# Altium PCB versi 1.0.PcbDoc (part 2 of 2)
Units mm, origin at the board's own origin, x right, y up, seen from the top; angles counter-clockwise.
Board outline 227.58 x 135.13 mm, 2 copper layers (Top Layer, Bottom Layer); 54 components, 49 nets, 360 pads, 39 vias.
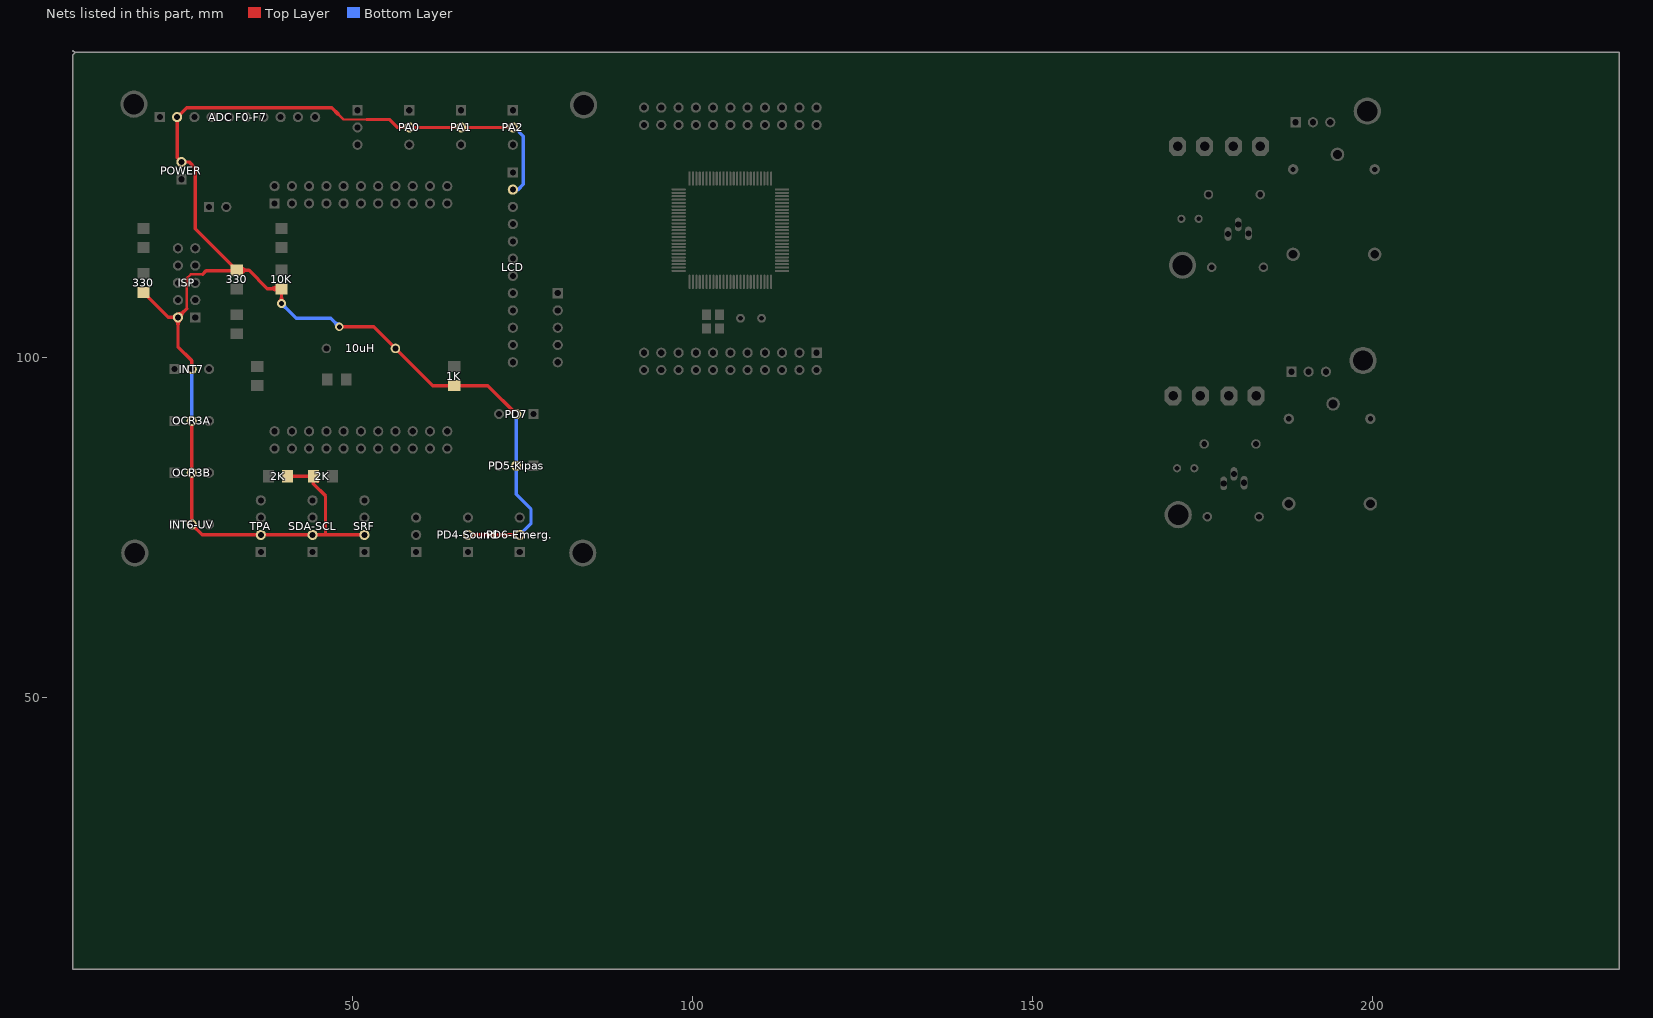
[diagram p2: the nets of this part, all layers, seen from the top]

## Via types
v1: diameter 1.27, hole 0.711, Top Layer to Bottom Layer, 39 vias

## Nets (pads, with @x,y where several pads share a name; then routed paths per layer and width w, separated by ;. In a path a pad name is that pad's centre, name@x,y a point inside that pad or via, vN(x,y) a via of type N, cw(c..) or ccw(c..) an arc to the next point about the centre after c; other vN are vias at no path point) (continued)
VCC: 1K.2 2K.2 10K.2 10uH.2 330.1@32.893,112.906 330.2@19.177,109.598 "ADC F0-F7.2" INT6-UV.2 INT7.2 ISP.2 LCD.2 OCR3A.2 OCR3B.2 PA0.2 PA1.2 PA2.2 PD4-Sound.2 PD5-Kipas.2 PD6-Emerg..2 PD7.2 POWER.2 SDA-SCL.2 SRF.2 TPA.2 | length 274.2
  Top Layer w0.35: 25.527,107.188 25.527,111.633 26.162,112.268 27.877,112.268 ; 47.879,135.763 48.605,135.037 52.034,135.037
  Top Layer w0.5: 330.2@19.177,109.598 22.857,105.918 ISP.2@24.257,105.918 ; ISP.2@23.903,105.564 cw(c23.05,104.711) 24.257,104.711 cw(c25.464,104.711) ISP.2@24.611,105.564 ; ISP.2@24.257,106.418 ccw(c24.257,107.625) 25.111,106.772 ccw(c25.964,105.918) ISP.2@24.757,105.918 ; 25.527,107.188 ISP.2@24.257,105.918 ; OCR3A.2@25.935,90.832 cw(c25.082,89.979) 26.289,89.979 cw(c27.496,89.979) OCR3A.2@26.643,90.832 ; INT6-UV.2@26.289,75.438 27.813,73.914 TPA.2@36.449,73.914 SDA-SCL.2@44.069,73.914 SRF.2@51.689,73.914 ; INT6-UV.2@26.289,76.073 OCR3A.2@26.289,90.678 ; INT7.2@26.289,98.298 26.289,99.568 24.257,101.6 ISP.2@24.257,105.918 ; 27.877,112.268 28.384,112.776 330.1@32.893,112.776 ; 330.1@32.808,112.941 cw(c32.722,112.856) 330.1@32.843,112.856 ; 330.1@32.893,112.856 34.718,112.856 37.418,110.156 39.497,110.156 v1(39.497,107.95) ; 330.1@32.893,112.906 32.843,112.906 26.797,118.952 26.797,127.889 25.908,128.778 POWER.2@24.765,128.778 24.13,129.413 24.13,135.382 25.527,136.779 46.863,136.779 47.879,135.763 ; 33.855,112.644 cw(c34.367,112.132) 34.367,112.856 cw(c34.367,113.58) 33.855,113.068 ; 38.535,109.944 ccw(c38.023,109.432) 38.023,110.156 ccw(c38.023,110.88) 38.535,110.368 ; v1@39.225,108.222 ccw(c38.568,108.879) 39.497,108.879 ccw(c40.426,108.879) v1@39.769,108.222 ; 10K.2@39.285,109.944 cw(c38.773,109.432) 39.497,109.432 cw(c40.221,109.432) 10K.2@39.709,109.944 ; 2K.2@40.339,82.55 2K.2@44.069,82.55 ; 2K.2@40.551,82.338 cw(c41.063,81.826) 41.063,82.55 cw(c41.063,83.274) 2K.2@40.551,82.762 ; 2K.2@44.031,82.338 ccw(c43.519,81.826) 43.519,82.55 ccw(c43.519,83.274) 2K.2@44.031,82.762 ; 2K.2@44.126,82.49 cw(c44.127,82.486) 2K.2@44.13,82.489 ; 2K.2@44.193,82.55 44.193,81.41 45.974,79.629 45.974,73.914 ; 2K.2@44.21,81.997 cw(c44.325,81.314) 2K.2@44.815,81.804 ; v1(48.006,104.521) 53.086,104.521 10uH.2@56.261,101.346 61.725,95.882 1K.2@64.897,95.882 69.853,95.882 PD7.2@74.041,91.694 ; 52.034,135.037 55.372,135.037 56.551,133.858 PA0.2@58.293,133.858 PA1.2@65.913,133.858 PA2.2@73.533,133.858 ; PD4-Sound.2@66.929,73.914 PD6-Emerg..2@74.549,73.914
  Bottom Layer w0.5: OCR3A.2@26.289,90.678 INT7.2@26.289,98.298 ; v1@39.497,107.565 cw(c39.497,106.636) 40.154,107.293 cw(c40.811,107.95) v1@39.882,107.95 ; v1(39.497,107.95) 41.656,105.791 46.736,105.791 v1(48.006,104.521) ; v1@47.621,104.521 ccw(c46.692,104.521) 47.349,105.178 ccw(c48.006,105.835) v1@48.006,104.906 ; LCD.2@73.533,124.714 74.295,124.714 75.057,125.476 75.057,132.588 73.787,133.858 PA2.2@73.533,133.858 ; PD7.2@74.041,91.694 PD5-Kipas.2@74.041,84.074 74.041,79.883 76.2,77.724 76.2,75.565 PD6-Emerg..2@74.549,73.914
pads on no net: 2.1 2.2 22pF.1 22pF.2 220.1 220.2 220_1.1 220_1.2 _2.1 _2.2 ATmega2560.1 ATmega2560.2 ATmega2560.3 ATmega2560.4 ATmega2560.5 ATmega2560.6 ATmega2560.7 ATmega2560.8 ATmega2560.9 ATmega2560.10 ATmega2560.11 ATmega2560.12 ATmega2560.13 ATmega2560.14 ATmega2560.15 ATmega2560.16 ATmega2560.17 ATmega2560.18 ATmega2560.19 ATmega2560.20 ATmega2560.21 ATmega2560.22 ATmega2560.23 ATmega2560.24 ATmega2560.25 ATmega2560.26 ATmega2560.27 ATmega2560.28 ATmega2560.29 ATmega2560.30 ATmega2560.31 ATmega2560.32 ATmega2560.33 ATmega2560.34 ATmega2560.35 ATmega2560.36 ATmega2560.37 ATmega2560.38 ATmega2560.39 ATmega2560.40 ATmega2560.41 ATmega2560.42 ATmega2560.43 ATmega2560.44 ATmega2560.45 ATmega2560.46 ATmega2560.47 ATmega2560.48 ATmega2560.49 ATmega2560.50 ATmega2560.51 ATmega2560.52 ATmega2560.53 ATmega2560.54 ATmega2560.55 ATmega2560.56 ATmega2560.57 ATmega2560.58 ATmega2560.59 ATmega2560.60 ATmega2560.61 ATmega2560.62 ATmega2560.63 ATmega2560.64 ATmega2560.65 ATmega2560.66 ATmega2560.67 ATmega2560.68 ATmega2560.69 ATmega2560.70 ATmega2560.71 ATmega2560.72 ATmega2560.73 ATmega2560.74 ATmega2560.75 ATmega2560.76 ATmega2560.77 ATmega2560.78 ATmega2560.79 ATmega2560.80 ATmega2560.81 ATmega2560.82 ATmega2560.83 ATmega2560.84 ATmega2560.85 ATmega2560.86 ATmega2560.87 ATmega2560.88 ATmega2560.89 ATmega2560.90 ATmega2560.91 ATmega2560.92 ATmega2560.93 ATmega2560.94 ATmega2560.95 ATmega2560.96 ATmega2560.97 ATmega2560.98 ATmega2560.99 ATmega2560.100 Batt.1 Batt.2 Header.A.1@118.237,100.711 Header.A.2@115.697,100.711 Header.A.3@113.157,100.711 Header.A.4@110.617,100.711 Header.A.5@108.077,100.711 Header.A.6@105.537,100.711 Header.A.7@102.997,100.711 Header.A.8@100.457,100.711 Header.A.9@97.917,100.711 Header.A.10@95.377,100.711 Header.A.11@92.837,100.711 Header.A.12@118.237,98.171 Header.A.13@115.697,98.171 Header.A.14@113.157,98.171 Header.A.15@110.617,98.171 Header.A.16@108.077,98.171 Header.A.17@105.537,98.171 Header.A.18@102.997,98.171 Header.A.19@100.457,98.171 Header.A.20@97.917,98.171 Header.A.21@95.377,98.171 Header.A.22@92.837,98.171 Header.B.1@92.837,134.239 Header.B.2@95.377,134.239 Header.B.3@97.917,134.239 Header.B.4@100.457,134.239 Header.B.5@102.997,134.239 Header.B.6@105.537,134.239 Header.B.7@108.077,134.239 Header.B.8@110.617,134.239 Header.B.9@113.157,134.239 Header.B.10@115.697,134.239 Header.B.11@118.237,134.239 Header.B.12@92.837,136.779 Header.B.13@95.377,136.779 Header.B.14@97.917,136.779 Header.B.15@100.457,136.779 Header.B.16@102.997,136.779 Header.B.17@105.537,136.779 Header.B.18@108.077,136.779 Header.B.19@110.617,136.779 Header.B.20@113.157,136.779 Header.B.21@115.697,136.779 Header.B.22@118.237,136.779 Kipas.1 Kipas.2 LED.1 LED.2 Mikon.1 Mikon.2 Mikon.3 xtal.1 xtal.2
copper on no net: | length 1695.3
  Top Layer w0.3: 92.262,98.171 ccw(c90.874,98.171) 91.855,99.153 ccw(c92.837,100.134) 92.837,98.746 ; 92.344,136.483 ccw(c91.821,136.169) 91.821,136.779 ; 92.344,137.075 cw(c91.821,137.389) 91.821,136.779 ; 92.43,101.118 ccw(c91.449,102.099) 92.837,102.099 ccw(c94.225,102.099) 93.244,101.118 ; 92.837,98.171 91.44,99.568 91.44,108.585 93.345,110.49 93.345,120.269 95.821,122.745 97.937,122.745 ; 92.837,100.711 92.837,108.585 96.997,112.745 97.937,112.745 ; 92.837,133.664 cw(c92.837,132.276) 93.819,133.257 cw(c94.8,134.239) 93.412,134.239 ; 92.837,134.239 95.377,131.699 99.822,131.699 100.076,131.445 102.362,131.445 103.378,130.429 104.013,130.429 104.648,129.794 104.648,129.159 103.537,128.048 103.537,126.345 ; 92.837,136.779 91.821,136.779 ; v1@94.432,125.024 cw(c95.218,124.238) 95.218,125.349 cw(c95.218,126.46) v1@94.432,125.674 ; v1@94.488,125.349 95.631,125.349 96.735,124.245 97.937,124.245 ; v1(94.615,114.935) 94.805,114.745 97.937,114.745 ; v1@94.693,115.013 ccw(c95.339,115.659) 95.339,114.745 ; 94.802,136.779 cw(c93.414,136.779) 94.395,135.797 cw(c95.377,134.816) 95.377,136.204 ; v1@94.94,114.61 cw(c95.267,114.283) 95.267,114.745 ; v1@94.94,115.26 ccw(c96.184,116.504) 96.184,114.745 ; 94.97,101.118 ccw(c93.989,102.099) 95.377,102.099 ccw(c96.765,102.099) 95.784,101.118 ; v1@94.996,116.253 cw(c94.996,115.142) 95.781,115.928 cw(c96.567,116.713) v1@95.456,116.713 ; v1(94.996,116.713) 96.464,115.245 97.937,115.245 ; v1@95.25,120.142 95.25,120.65 96.845,122.245 97.937,122.245 ; v1@95.25,120.856 ccw(c95.25,121.353) 95.602,121.002 ; v1(95.25,123.952) 95.504,123.952 95.711,123.745 97.937,123.745 ; v1@95.328,124.03 ccw(c96.015,124.717) 96.015,123.745 ; v1@95.36,120.396 cw(c96.239,120.396) 95.617,121.017 ; 95.377,100.711 95.377,106.172 99.537,110.332 99.537,111.145 ; v1(95.377,129.159) 96.012,128.524 100.457,128.524 101.037,127.944 101.037,126.345 ; 95.377,133.664 cw(c95.377,132.276) 96.359,133.257 cw(c97.34,134.239) 95.952,134.239 ; 95.377,134.239 97.282,132.334 100.203,132.334 100.584,131.953 102.616,131.953 103.632,130.937 104.648,130.937 105.41,130.175 105.41,129.159 104.037,127.786 104.037,126.619 ; 95.377,136.779 94.234,135.636 92.329,135.636 91.44,134.747 91.44,131.445 94.996,127.889 100.203,127.889 100.537,127.555 100.537,126.345 ; v1(95.504,113.284) 96.465,114.245 97.937,114.245 ; v1@95.504,113.744 ccw(c95.504,114.855) 96.289,114.069 ccw(c97.075,113.284) v1@95.964,113.284 ; v1@95.575,123.627 cw(c95.861,123.341) 95.861,123.745 ; v1@95.575,124.277 ccw(c96.86,125.562) 96.86,123.745 ; v1@95.71,120.396 cw(c97.434,120.396) 96.215,121.615 ; 97.51,101.118 ccw(c96.529,102.099) 97.917,102.099 ccw(c99.305,102.099) 98.324,101.118 ; v1@97.791,130.81 99.695,130.81 102.037,128.468 102.037,126.345 ; 97.917,100.711 97.917,107.315 99.695,109.093 100.584,109.093 101.537,110.046 101.537,111.145 ; 97.917,133.664 cw(c97.917,132.276) 98.899,133.257 cw(c99.88,134.239) 98.492,134.239 ; 97.917,134.239 99.187,132.969 100.584,132.969 101.092,132.461 102.997,132.461 104.013,131.445 105.283,131.445 106.045,130.683 106.045,129.032 104.537,127.524 104.537,126.345 ; 97.937,119.745 99.711,119.745 v1(100.584,118.872) ; 97.937,120.245 102.362,120.245 ; v1@98.369,130.358 cw(c99.461,129.266) 99.461,130.81 ; v1@98.369,131.008 ccw(c98.848,131.487) 98.848,130.81 ; v1(99.314,129.54) 99.441,129.667 100.076,129.667 ; 99.537,126.345 99.537,127.223 94.711,127.223 90.805,131.129 90.805,135.763 91.821,136.779 ; v1@99.652,129.852 ccw(c100.076,130.245) 100.076,129.667 ; v1@99.759,129.423 cw(c100.076,129.339) 100.076,129.667 ; 100.037,126.345 100.037,124.626 v1@100.901,123.761 ; 100.05,101.118 ccw(c99.069,102.099) 100.457,102.099 ccw(c101.845,102.099) 100.864,101.118 ; 100.101,124.562 ccw(c100.795,125.257) v1@100.911,124.282 ; v1@100.124,118.872 ccw(c99.013,118.872) 99.799,119.657 ccw(c100.584,120.443) v1@100.584,119.332 ; 100.27,124.393 cw(c99.701,123.825) v1@100.505,123.825 ; 100.457,100.711 100.457,108.077 102.037,109.657 102.037,111.145 102.037,112.593 100.838,113.792 100.838,116.641 102.037,117.84 102.037,120.071 103.124,121.158 108.458,121.158 ; 100.457,133.664 cw(c100.457,132.276) 101.439,133.257 cw(c102.42,134.239) 101.032,134.239 ; 100.457,134.239 101.727,132.969 103.378,132.969 104.394,131.953 106.299,131.953 110.537,127.715 110.537,126.345 ; 101.439,109.948 ccw(c101.142,110.245) 101.562,110.245 ; 101.537,126.345 101.537,128.206 100.076,129.667 ; v1@101.6,130.048 101.6,129.794 102.537,128.857 102.537,126.345 ; v1@101.82,130.244 ccw(c102.341,129.92) 101.908,129.486 ; 101.982,106.714 ccw(c101.677,107.019) 102.108,107.019 ; v1@102.037,113.594 cw(c100.829,112.386) 102.537,112.386 ; 102.047,106.299 102.047,104.267 102.047,103.058 102.997,102.108 102.997,100.711 ; 102.108,106.299 102.108,108.712 102.537,109.141 102.537,111.145 102.537,113.332 v1@102.537,113.586 ; v1@102.118,130.059 ccw(c102.726,129.681) 102.219,129.175 ; v1@102.284,113.841 cw(c101.674,113.231) 102.537,113.231 cw(c103.05,113.231) v1@102.687,113.594 ; 102.59,101.118 ccw(c101.609,102.099) 102.997,102.099 ccw(c104.385,102.099) 103.404,101.118 ; 102.997,133.664 cw(c102.997,132.276) 103.979,133.257 cw(c104.96,134.239) 103.572,134.239 ; 102.997,134.239 104.648,132.588 106.807,132.588 111.037,128.358 111.037,126.345 ; 103.037,111.145 103.037,107.656 103.759,106.934 103.759,105.791 107.035,105.791 ; 103.037,126.345 103.037,128.945 v1@103.251,129.159 ; 103.037,127.479 cw(c105.312,127.479) v1@103.703,129.088 ; 103.037,128.324 cw(c104.467,128.324) v1@103.456,129.335 ; 103.37,107.323 cw(c102.52,106.473) 103.722,106.449 ; 103.537,111.145 103.537,108.553 105.029,107.061 108.865,107.061 110.135,105.791 108.611,104.267 103.747,104.267 ; 103.765,106.167 ccw(c104.672,107.074) 104.672,105.791 ; 104.012,104.002 cw(c104.652,103.362) 104.652,104.267 cw(c104.652,105.172) 104.012,104.532 ; 104.012,106.414 ccw(c105.517,107.919) 105.517,105.791 ; 104.037,111.145 104.037,114.197 106.426,116.586 v1(110.49,116.586) ; 104.037,126.345 104.037,126.619 ; 104.037,127.328 104.037,126.619 ; 104.537,111.145 104.537,113.554 106.299,115.316 v1(109.22,115.316) ; 105.037,111.145 105.037,113.038 106.426,114.427 108.204,114.427 109.093,113.538 ; v1(105.156,108.458) v1@105.41,108.458 ; v1@105.481,108.133 cw(c106.267,107.347) 106.267,108.458 cw(c106.267,109.569) v1@105.481,108.783 ; 105.537,111.145 105.537,112.522 106.299,113.284 v1(107.569,113.284) ; 105.537,133.664 cw(c105.537,132.276) 106.519,133.257 cw(c107.5,134.239) 106.112,134.239 ; 105.537,134.239 106.68,133.096 107.569,133.096 111.537,129.128 111.537,126.345 ; v1@105.664,108.712 v1@105.41,108.458 ; 106.699,105.455 ccw(c105.888,104.644) 105.888,105.791 ccw(c105.888,106.938) 106.699,106.127 ; v1@107.244,112.959 ccw(c106.458,112.173) 106.458,113.284 ccw(c106.458,114.395) v1@107.244,113.609 ; 108.037,111.145 108.037,109.815 106.68,108.458 v1@105.41,108.458 ; 108.077,133.664 cw(c108.077,132.276) 109.059,133.257 cw(c110.04,134.239) 108.652,134.239 ; 108.077,134.239 115.316,127 115.316,120.142 114.419,119.245 113.137,119.245 ; v1@108.204,123.698 v1@108.331,123.571 ; v1@108.26,108.783 ccw(c107.59,109.453) 108.537,109.453 ; v1@108.273,124.407 ccw(c108.406,125.289) 109.037,124.658 ; 108.537,109.684 ccw(c109.811,109.684) v1@108.91,108.783 ; 108.537,111.145 108.537,108.887 108.712,108.712 108.458,108.458 v1(108.585,108.458) ; 108.585,114.046 ccw(c109.172,114.633) v1@109.612,113.928 ; v1@108.585,124.206 109.037,124.658 ; v1@108.664,123.952 cw(c109.468,123.952) 108.899,124.52 ; v1@108.895,114.991 ccw(c108.109,114.205) 108.109,115.316 ccw(c108.109,116.427) v1@108.895,115.641 ; 108.897,113.734 ccw(c109.412,114.249) v1@109.797,113.631 ; 109.037,126.345 109.037,124.658 ; 109.208,113.423 ccw(c109.651,113.866) v1@109.982,113.334 ; v1@109.448,113.324 ccw(c109.093,113.137) 109.093,113.538 ; v1@109.448,113.752 cw(c109.093,113.939) 109.093,113.538 ; 109.537,126.345 109.537,122.237 108.458,121.158 ; v1(109.855,113.538) 109.093,113.538 ; 110.037,111.145 110.037,108.149 111.887,106.299 111.887,101.981 110.617,100.711 ; 110.135,105.316 ccw(c110.135,104.169) 109.324,104.98 ccw(c108.513,105.791) 109.66,105.791 ccw(c108.513,105.791) 109.324,106.602 ccw(c110.135,107.413) 110.135,106.266 ; v1@110.165,116.261 ccw(c109.379,115.475) 109.379,116.586 ccw(c109.379,117.697) v1@110.165,116.911 ; v1(110.49,118.999) 111.244,118.245 ; v1@110.503,118.539 cw(c110.533,117.534) 111.244,118.245 ; 110.537,111.145 110.537,108.792 113.157,106.172 113.157,100.711 ; 110.617,98.171 111.887,99.441 113.792,99.441 114.427,100.076 114.427,105.918 111.037,109.308 111.037,111.145 ; 110.617,98.746 ccw(c110.617,100.134) 111.599,99.153 ccw(c112.58,98.171) 111.192,98.171 ; 110.617,101.286 ccw(c110.617,102.674) 111.599,101.693 ccw(c112.58,100.711) 111.192,100.711 ; 110.617,133.664 cw(c110.617,132.276) 111.599,133.257 cw(c112.58,134.239) 111.192,134.239 ; 110.617,134.239 116.078,128.778 116.078,120.015 114.808,118.745 113.137,118.745 ; v1@110.95,118.986 ccw(c111.955,118.956) 111.244,118.245 ; 111.512,110.245 ccw(c112.161,110.245) 111.702,109.786 ; 111.537,111.145 111.537,109.951 116.967,104.521 116.967,100.203 116.205,99.441 115.062,99.441 ; 112.75,101.118 ccw(c111.769,102.099) 113.157,102.099 ccw(c114.545,102.099) 113.564,101.118 ; 113.137,113.745 114.347,113.745 115.062,113.03 118.491,113.03 119.634,114.173 v1(119.634,117.221) ; 113.137,114.245 114.609,114.245 115.189,113.665 117.856,113.665 118.364,114.173 v1(118.364,114.681) ; 113.137,114.745 114.998,114.745 115.443,114.3 116.586,114.3 117.243,114.957 117.348,115.062 v1(117.348,116.459) ; 113.137,115.745 115.014,115.745 115.57,115.189 v1@116.078,115.189 ; 113.137,116.245 115.102,116.245 119.126,120.269 119.126,133.35 ; 113.137,116.745 114.713,116.745 118.11,120.142 118.11,131.826 115.697,134.239 ; 113.137,117.245 114.324,117.245 117.094,120.015 117.094,130.302 113.157,134.239 ; 113.137,117.745 109.839,117.745 108.458,119.126 108.458,121.158 ; 113.137,118.245 111.244,118.245 ; 113.148,98.046 ccw(c113.223,99.109) 113.977,98.356 ; 113.157,98.171 113.792,98.171 115.062,99.441 ; 113.157,133.664 cw(c113.157,132.276) 114.139,133.257 cw(c115.12,134.239) 113.732,134.239 ; 113.173,98.395 ccw(c113.295,100.123) 114.519,98.898 ; 113.198,98.745 ccw(c113.366,101.136) 115.062,99.441 ; 115.697,133.664 cw(c115.697,132.276) 116.679,133.257 cw(c117.66,134.239) 116.272,134.239 ; v1@117.023,116.134 cw(c116.237,115.348) 117.348,115.348 cw(c118.459,115.348) v1@117.673,116.134 ; 118.237,134.239 119.126,133.35 ; 118.279,133.666 cw(c118.357,132.582) 119.126,133.35 ; 118.81,134.197 ccw(c119.894,134.119) 119.126,133.35 ; v1@119.309,116.896 cw(c118.523,116.11) 119.634,116.11 cw(c120.745,116.11) v1@119.959,116.896
  Bottom Layer w0.254: 199.71,90.989 200.17,90.989 ; 200.345,127.692 200.805,127.692
  Bottom Layer w0.3: 93.726,123.531 cw(c95.652,123.531) v1@94.405,124.998 ; 93.726,124.287 cw(c95.009,124.287) v1@94.178,125.265 ; 93.741,116.093 cw(c94.972,114.863) v1@94.995,116.603 ; v1(94.107,125.349) 93.726,124.968 93.726,123.571 96.393,120.904 96.393,113.03 102.616,106.807 102.616,103.378 104.267,101.727 104.267,99.441 105.537,98.171 ; 94.248,119.521 cw(c95.25,118.519) v1@95.25,119.936 ; v1@94.29,114.61 cw(c93.811,114.131) 94.488,114.131 ; 94.328,116.68 cw(c94.987,116.021) v1@94.999,116.953 ; 94.488,113.518 cw(c96.032,113.518) v1@94.94,114.61 ; v1@94.488,114.427 94.488,112.522 99.187,107.823 99.187,99.441 100.457,98.171 ; 94.555,119.828 ccw(c93.986,120.396) v1@94.79,120.396 ; v1@94.742,116.713 94.361,116.713 93.472,115.824 93.472,112.268 96.647,109.093 96.647,99.441 97.917,98.171 ; 94.802,98.171 ccw(c93.414,98.171) 94.395,99.153 ccw(c95.377,100.134) 95.377,98.746 ; v1@94.917,129.159 ccw(c93.806,129.159) 94.592,129.944 ccw(c95.377,130.73) v1@95.377,129.619 ; v1@94.996,120.015 94.742,120.015 92.456,117.729 92.456,102.997 94.107,101.346 94.107,99.441 95.377,98.171 ; v1@95.186,124.142 98.044,121.285 98.044,113.284 100.457,110.871 104.775,110.871 106.807,108.839 106.807,107.95 108.204,106.553 108.204,104.521 106.807,103.124 106.807,99.441 108.077,98.171 ; v1@95.25,123.492 cw(c95.25,122.075) 96.252,123.077 ; v1(95.377,129.159) 94.107,130.429 94.107,134.874 94.742,135.509 96.012,135.509 97.282,136.779 97.917,136.779 ; v1@95.504,113.665 v1(95.504,113.284) 95.504,112.776 101.727,106.553 101.727,99.441 102.997,98.171 ; v1@95.614,113.284 ccw(c97.106,113.284) 96.051,112.229 ; v1@95.71,123.952 ccw(c96.514,123.952) 95.945,123.384 ; v1@95.964,113.284 ccw(c98.301,113.284) 96.648,111.632 ; 96.018,135.502 cw(c97.917,133.283) 97.917,136.204 ; 96.449,135.946 cw(c97.917,134.478) 97.917,136.554 ; 97.046,136.543 cw(c97.917,135.673) 97.917,136.904 ; 97.342,98.171 ccw(c95.954,98.171) 96.935,99.153 ccw(c97.917,100.134) 97.917,98.746 ; v1@97.663,130.683 98.044,130.683 98.044,132.334 99.187,133.477 99.187,135.001 99.695,135.509 101.727,135.509 102.997,136.779 ; v1@97.719,131.008 ccw(c96.933,131.794) 98.044,131.794 ccw(c99.155,131.794) v1@98.369,131.008 ; 97.897,129.413 ccw(c97.897,130.957) v1@98.989,129.865 ; 98.51,129.413 cw(c98.51,128.736) v1@98.989,129.215 ; 98.558,135.502 cw(c100.457,133.283) 100.457,136.204 ; 98.989,135.946 cw(c100.457,134.478) 100.457,136.554 ; v1(99.314,129.54) 99.441,129.667 99.06,129.667 98.806,129.413 96.774,129.413 95.758,130.429 95.758,132.461 96.647,133.35 96.647,134.747 97.409,135.509 98.552,135.509 99.822,136.779 100.457,136.779 ; 99.586,136.543 cw(c100.457,135.673) 100.457,136.904 ; 99.882,98.171 ccw(c98.494,98.171) 99.475,99.153 ccw(c100.457,100.134) 100.457,98.746 ; v1@100.259,118.547 cw(c99.473,117.761) 100.584,117.761 cw(c101.695,117.761) v1@100.909,118.547 ; v1@100.584,119.26 v1(100.584,118.872) 100.584,116.078 102.997,113.665 103.632,113.665 ; 100.965,123.19 100.965,123.698 108.458,123.698 110.49,121.666 v1(110.49,118.999) 110.49,118.618 107.95,118.618 103.632,114.3 103.632,113.665 ; v1@101.29,123.5 cw(c101.769,123.021) 101.769,123.698 ; v1@101.29,124.15 ccw(c102.382,125.242) 102.382,123.698 ; 101.307,115.355 cw(c99.872,113.919) v1@101.902,113.919 ; v1(101.727,130.302) 104.267,132.842 104.267,135.509 105.537,136.779 ; v1@101.727,130.762 ccw(c101.727,131.873) 102.512,131.087 ccw(c103.298,130.302) v1@102.187,130.302 ; 101.905,114.757 cw(c101.067,113.919) v1@102.252,113.919 ; 102.422,98.171 ccw(c101.034,98.171) 102.015,99.153 ccw(c102.997,100.134) 102.997,98.746 ; 102.422,136.779 cw(c101.034,136.779) 102.015,135.797 cw(c102.997,134.816) 102.997,136.204 ; v1@102.456,113.976 ccw(c103.009,114.313) 103.009,113.665 ; v1@102.755,114.158 ccw(c103.632,114.691) 103.632,113.665 ; v1(103.378,129.413) 106.807,132.842 106.807,135.509 108.077,136.779 ; v1@103.378,129.873 ccw(c103.378,130.984) 104.163,130.198 ccw(c104.949,129.413) v1@103.838,129.413 ; v1@104.831,108.133 cw(c104.045,107.347) 105.156,107.347 cw(c106.267,107.347) v1@105.481,108.133 ; 104.962,98.171 ccw(c103.574,98.171) 104.555,99.153 ccw(c105.537,100.134) 105.537,98.746 ; 104.962,136.779 cw(c103.574,136.779) 104.555,135.797 cw(c105.537,134.816) 105.537,136.204 ; 105.156,102.174 ccw(c107,102.174) 105.696,100.87 ; 105.156,103.019 ccw(c107.845,103.019) 105.944,101.118 ; v1(105.156,108.458) 105.156,101.092 105.537,100.711 105.791,100.965 ; 106.48,123.698 ccw(c106.48,125.676) v1@107.879,124.277 ; 107.325,123.698 ccw(c107.325,124.831) v1@108.126,124.03 ; 107.502,98.171 ccw(c106.114,98.171) 107.095,99.153 ccw(c108.077,100.134) 108.077,98.746 ; 107.502,136.779 cw(c106.114,136.779) 107.095,135.797 cw(c108.077,134.816) 108.077,136.204 ; v1@107.569,112.824 cw(c107.569,111.713) 108.354,112.499 cw(c109.14,113.284) v1@108.029,113.284 ; v1(107.569,113.284) 111.887,108.966 111.887,100.076 112.649,99.314 114.554,99.314 115.697,98.171 ; 108.077,100.711 108.839,101.473 108.839,107.95 v1@108.585,108.204 ; v1@108.204,123.492 cw(c108.204,122.381) 108.989,123.167 cw(c109.775,123.952) v1@108.664,123.952 ; v1@108.26,108.133 cw(c106.861,106.734) 108.839,106.734 ; 108.46,118.618 ccw(c108.46,121.029) 110.165,119.324 ccw(c109.379,120.11) 110.49,120.11 ccw(c111.601,120.11) v1@110.815,119.324 ; v1@108.507,108.38 cw(c107.706,107.579) 108.839,107.579 ; v1@109.22,114.856 cw(c109.22,112.519) 110.872,114.172 ; v1@109.22,115.206 cw(c109.22,113.714) 110.275,114.769 ; v1(109.22,115.316) 109.728,115.316 115.697,109.347 115.697,100.711 ; 109.305,118.618 ccw(c109.305,120.184) v1@110.412,119.077 ; v1@109.855,113.078 cw(c109.855,111.967) 110.64,112.753 cw(c111.426,113.538) v1@110.315,113.538 ; v1(109.855,113.538) 114.427,108.966 114.427,100.203 115.189,99.441 116.967,99.441 118.237,98.171 ; v1@110.49,116.126 cw(c110.49,115.015) 111.275,115.801 cw(c112.061,116.586) v1@110.95,116.586 ; v1(110.49,116.586) 118.237,108.839 118.237,100.711 ; 110.617,136.204 cw(c110.617,134.816) 111.599,135.797 cw(c112.58,136.779) 111.192,136.779 ; 110.617,136.779 111.887,135.509 111.887,128.143 115.57,124.46 115.57,116.586 116.078,116.078 v1@116.078,115.316 ; 113.157,136.204 cw(c113.157,134.816) 114.139,135.797 cw(c115.12,136.779) 113.732,136.779 ; 113.157,136.779 114.427,135.509 114.427,126.746 116.332,124.841 116.332,117.475 v1(117.348,116.459) ; 115.122,98.171 ccw(c113.734,98.171) 114.715,99.153 ccw(c115.697,100.134) 115.697,98.746 ; 115.29,101.118 ccw(c114.309,102.099) 115.697,102.099 ccw(c117.085,102.099) 116.104,101.118 ; 115.59,116.566 cw(c114.837,115.814) v1@115.847,115.478 ; 115.697,136.204 cw(c115.697,134.816) 116.679,135.797 cw(c117.66,136.779) 116.272,136.779 ; 115.697,136.779 116.967,135.509 116.967,118.618 118.491,117.094 v1@118.491,114.681 ; 115.99,116.166 cw(c115.438,115.614) v1@116.179,115.367 ; v1@116.888,116.459 ccw(c115.777,116.459) 116.563,117.244 ccw(c117.348,118.03) v1@117.348,116.919 ; 117.662,98.171 ccw(c116.274,98.171) 117.255,99.153 ccw(c118.237,100.134) 118.237,98.746 ; 117.83,101.118 ccw(c116.849,102.099) 118.237,102.099 ccw(c119.625,102.099) 118.644,101.118 ; v1@118.039,115.006 ccw(c116.947,116.098) 118.491,116.098 ; 118.237,136.204 cw(c118.237,134.816) 119.219,135.797 cw(c120.2,136.779) 118.812,136.779 ; 118.237,136.779 119.507,135.509 119.507,117.475 v1@119.761,117.221 ; 118.491,115.485 ccw(c119.168,115.485) v1@118.689,115.006 ; v1@119.309,117.546 ccw(c118.83,118.025) 119.507,118.025 ; 119.507,118.638 ccw(c121.051,118.638) v1@119.959,117.546
  Bottom Layer w0.6: 171.196,83.716 175.724,79.188 175.724,76.581 ; 171.831,120.419 176.359,115.891 176.359,113.284 ; 175.256,87.285 175.256,87.259 179.634,82.881 ; 175.891,123.988 175.891,123.962 180.269,119.584 ; 177.934,81.281 178.134,81.481 176.075,81.481 173.863,83.693 168.134,89.422 168.134,96.681 171.434,99.981 186.023,99.981 188.087,97.917 ; 178.569,117.984 178.769,118.184 176.71,118.184 174.498,120.396 168.769,126.125 168.769,133.384 172.069,136.684 186.658,136.684 188.722,134.62 ; 181.134,81.581 190.534,81.581 200.056,91.103 ; 181.769,118.284 191.169,118.284 200.691,127.806 ; 182.876,87.285 191.425,87.285 196.469,92.329 196.469,94.488 192.913,98.044 ; 183.344,76.581 193.834,76.581 202.834,85.581 202.834,92.881 201.034,94.681 198.054,94.681 194.945,97.79 194.945,98.552 193.929,99.568 192.021,99.568 190.334,97.881 ; 183.511,123.988 192.06,123.988 197.104,129.032 197.104,131.191 193.548,134.747 ; 183.979,113.284 194.469,113.284 203.469,122.284 203.469,129.584 201.669,131.384 198.689,131.384 195.58,134.493 195.58,135.255 194.564,136.271 192.656,136.271 190.969,134.584 ; 199.37,90.989 199.71,90.989 ; 200.005,127.692 200.345,127.692
  Bottom Layer w1: 171.302,94.381 170.534,93.613 170.534,92.181 172.734,89.981 176.734,89.981 178.902,92.149 178.902,94.381 ; 171.937,131.084 171.169,130.316 171.169,128.884 173.369,126.684 177.369,126.684 179.537,128.852 179.537,131.084 ; 174.702,94.381 174.702,96.349 176.234,97.881 184.134,97.881 186.574,95.441 186.574,92.141 188.034,90.681 191.726,90.681 194.234,93.189 ; 175.234,94.449 175.302,94.381 ; 175.337,131.084 175.337,133.052 176.869,134.584 184.769,134.584 187.209,132.144 187.209,128.844 188.669,127.384 192.361,127.384 194.869,129.892 ; 175.869,131.152 175.937,131.084 ; 182.902,93.496 182.902,94.381 182.902,90.749 180.434,88.281 180.434,86.181 182.534,84.081 190.126,84.081 198.755,92.71 200.505,92.71 201.534,91.681 201.534,89.381 190.334,78.181 187.71,78.181 ; 183.537,130.199 183.537,131.084 183.537,127.452 181.069,124.984 181.069,122.884 183.169,120.784 190.761,120.784 199.39,129.413 201.14,129.413 202.169,128.384 202.169,126.084 190.969,114.884 188.345,114.884
  other v1: 102.362,113.919 115.951,115.443 95.25,120.396 100.965,123.825 108.204,123.952 97.981,130.683

## Other copper
Bottom Layer:
  region: 99.695,124.587 111.379,124.587 111.379,118.618 108.204,115.951 104.394,112.903 99.695,112.903
Multi-Layer:
  lines w0.254: 88.646,95.377 122.428,95.377 122.428,139.573 88.646,139.573 88.646,95.377
  lines w0.5: 15.24,68.58 86.487,68.58 86.487,139.827 15.24,139.827 15.24,68.58 ; 166.934,74.481 166.934,101.981 203.934,101.981 203.934,74.481 166.934,74.481 ; 167.569,111.184 204.569,111.184 204.569,138.684 167.569,138.684 167.569,111.184

## Silkscreen, mask and mechanical layers (free items; w line width, h text height)
Top Overlay:
  lines w0.2: 177.594,80.197 cw(c179.574,81.697) 181.554,80.197 177.594,80.197 ; 178.229,116.9 cw(c180.209,118.4) 182.189,116.9 178.229,116.9
  lines w0.254: 34.29,83.693 68.072,83.693 68.072,127.889 34.29,127.889 34.29,83.693 ; 186.234,75.481 201.234,75.481 201.234,95.231 186.234,95.231 186.234,75.481 ; 186.869,112.184 186.869,131.934 201.869,131.934 201.869,112.184 186.869,112.184
  text "G" at 178.489,136.016 h1.52
  text "G" at 170.357,135.988 h1.52
  text "G" at 187.902,133.028 h1.52 r270
  text "^" at 120.523,120.65 h1.52
  text "|" at 121.031,120.015 h1.52
  text "G" at 173.628,118.795 h1.52 r270
  text "3" at 181.669,116.652 h1.5 r270
  text "1" at 177.269,116.552 h1.5 r270
  text "330" at 181.109,113.612 h0.8 r180
  text "ATmega2560" at 44.831,107.569 h1.52
  text "^" at 65.786,107.061 h1.52
  text "|" at 66.294,106.426 h1.52
  text "v1.0" at 20.066,99.441 h1.52 r90
  text "G" at 177.854,99.313 h1.52
  text "G" at 169.722,99.285 h1.52
  text "G" at 187.267,96.325 h1.52 r270
  text "G" at 172.993,82.092 h1.52 r270
  text "3" at 181.034,79.949 h1.5 r270
  text "1" at 176.634,79.849 h1.5 r270
  text "330" at 180.474,76.909 h0.8 r180
  text "Revenant" at 19.939,75.184 h3 r90
  text "Single Layer, masking + overlay, bahan fr4" at 150.368,61.341 h4
  text "Double layer, trough hole, masking+overlay" at 12.7,59.817 h4
Mechanical 15:
  lines w0.1: 179.074,81.697 180.074,81.697 ; 179.574,81.197 179.574,82.197 ; 179.709,118.4 180.709,118.4 ; 180.209,117.9 180.209,118.9

## Text inside footprints (layer, text, board x,y; h text height)
Header.A: Top Overlay "1" at 120.269,101.219 h1 r180; Top Overlay "12" at 121.793,98.679 h1 r180; Top Overlay "11" at 91.313,101.219 h1 r180; Top Overlay "22" at 91.313,98.679 h1 r180
Header.A: Top Overlay "22" at 36.957,87.122 h1 r180; Top Overlay "11" at 36.957,89.662 h1 r180; Top Overlay "12" at 67.564,87.249 h1 r180; Top Overlay "1" at 66.167,89.789 h1 r180
Header.B: Top Overlay "1" at 90.805,133.731 h1; Top Overlay "12" at 89.281,136.271 h1; Top Overlay "11" at 119.761,133.731 h1; Top Overlay "22" at 119.761,136.271 h1
Header.B: Top Overlay "1" at 36.449,122.174 h1; Top Overlay "12" at 34.925,124.714 h1; Top Overlay "11" at 65.405,122.174 h1; Top Overlay "22" at 65.405,124.714 h1
ISP: Top Overlay "10" at 24.257,117.602 h1 r90; Top Overlay "9" at 27.305,117.602 h1 r90; Top Overlay "1" at 27.305,103.886 h1 r90; Top Overlay "2" at 24.765,103.378 h1 r90